# Altium PCB PCB1.PcbDoc (part 2 of 2)
Units mil, origin at the board's own origin, x right, y up, seen from the top; angles counter-clockwise.
Board outline 2900 x 2900 mil, 4 copper layers (Top Layer, Inner Layer, GND, Bottom Layer), stack 23.756 mil thick; 59 components, 117 nets, 456 pads, 163 vias.
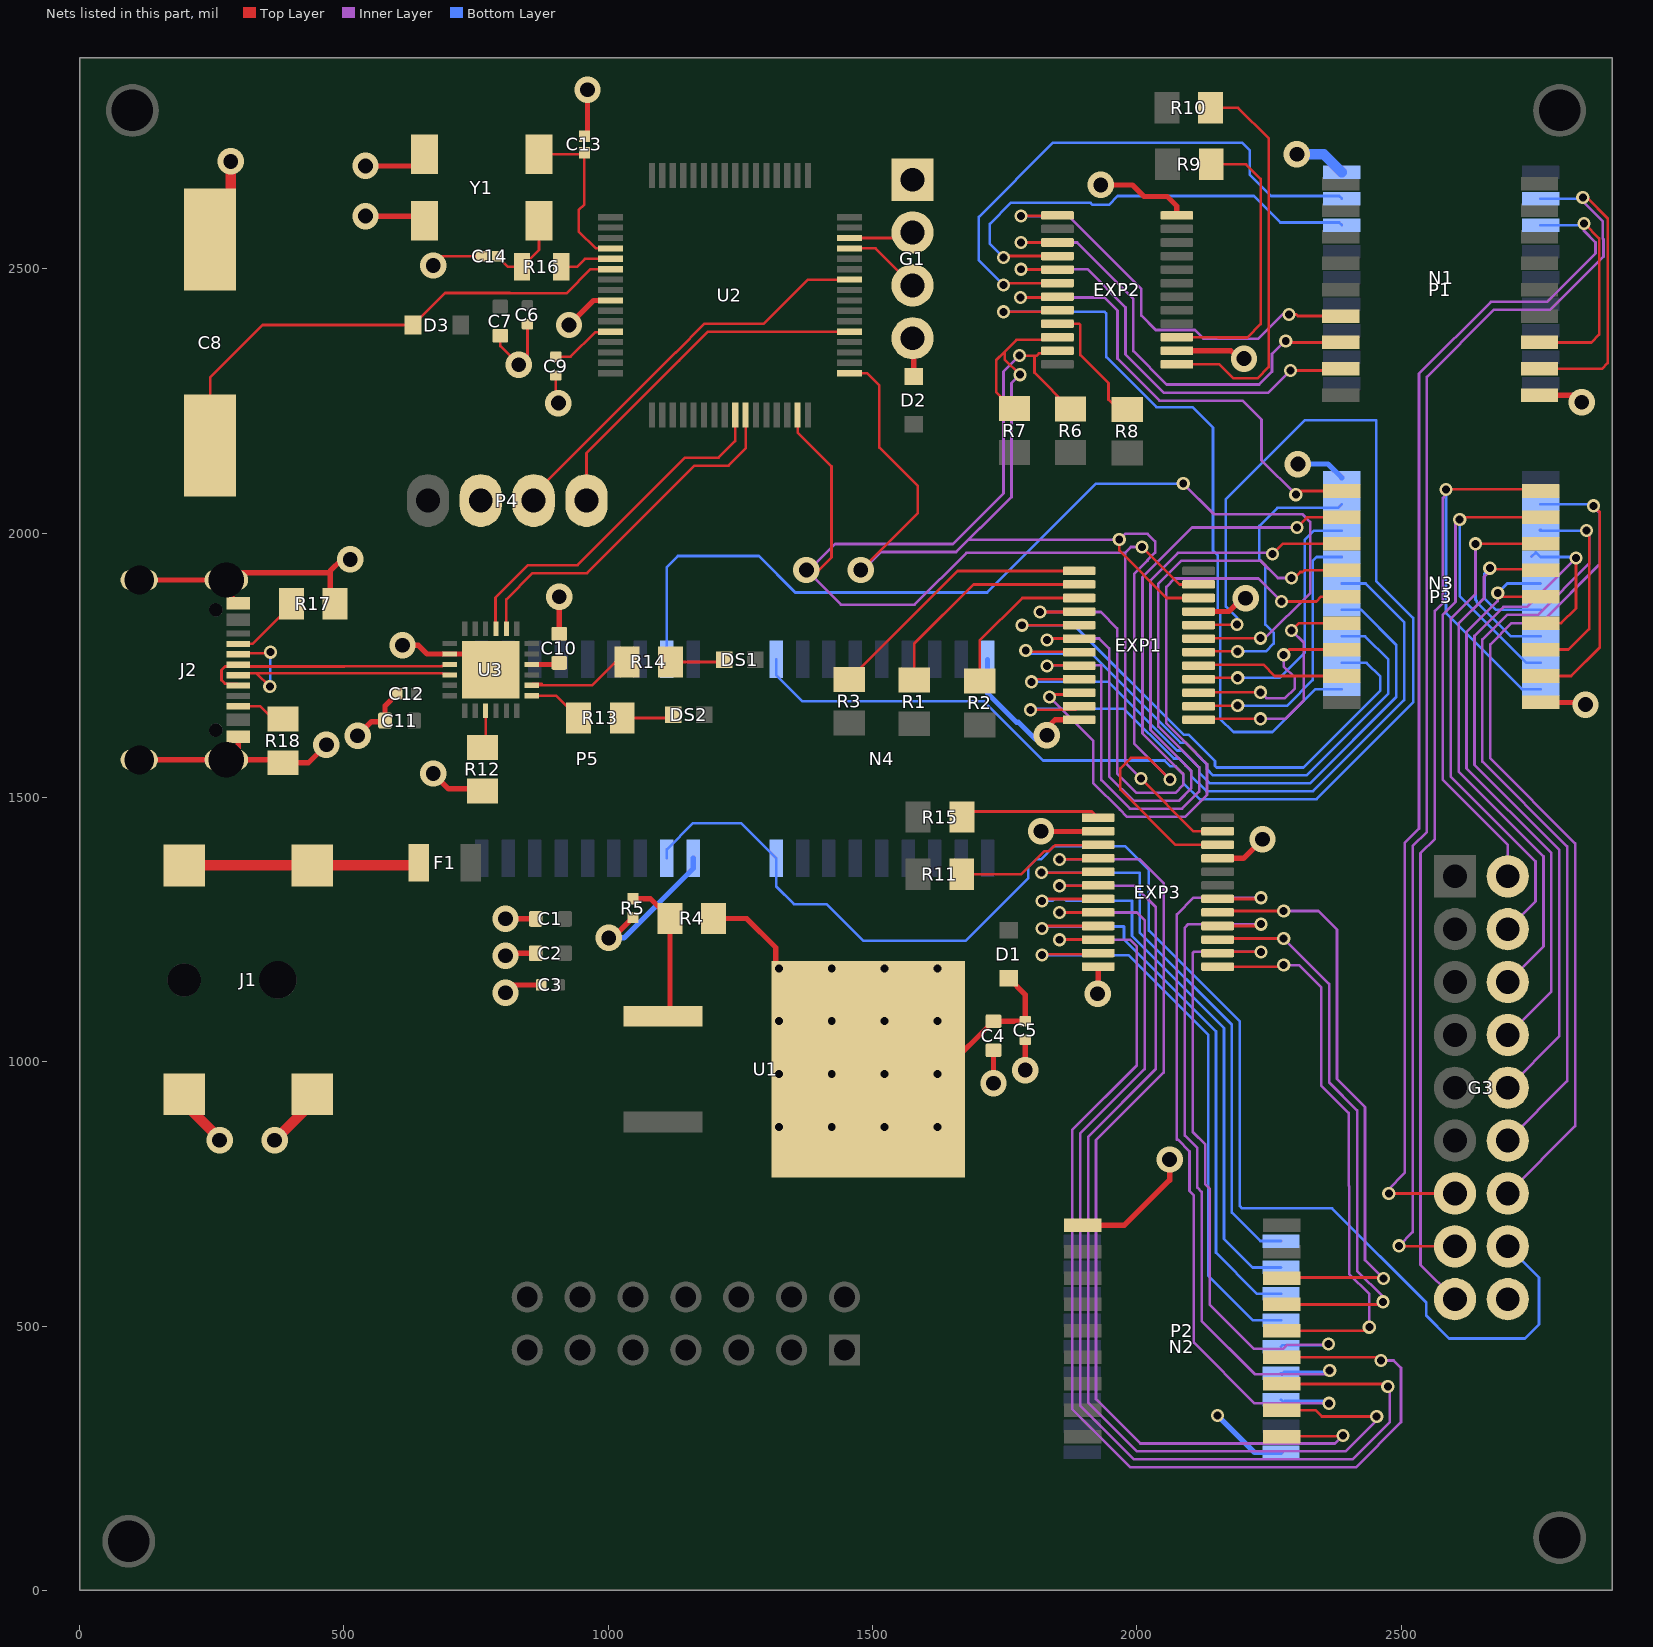
[diagram p4: the nets of this part, all layers, seen from the top]

## Via types
v1: diameter 25, hole 15, Top Layer to Bottom Layer, 123 vias
v2: diameter 50, hole 28, Top Layer to Bottom Layer, 36 vias
v3: diameter 100, hole 78, Top Layer to Bottom Layer, 4 vias

## Nets (pads, with @x,y where several pads share a name; then routed paths per layer and width w, separated by ;. In a path a pad name is that pad's centre, name@x,y a point inside that pad or via, vN(x,y) a via of type N, cw(c..) or ccw(c..) an arc to the next point about the centre after c; other vN are vias at no path point) (continued)
"Column 6 \"1\"": EXP2.13 P1.6 | length 822.1
  Top Layer w5: v1@1781.66,2600.66 EXP2.13@1849.36,2600.66 ; v1(2288,2414) 2301.89,2414 2304.89,2411 P1.6@2386.01,2411
  Top Layer w10: v1(1781,2600) v1@1781.66,2600.66 ; EXP2.13@1849.36,2600.66 EXP2.13@1850.02,2601.31
  Inner Layer w5: v1(1781,2600) 1871,2600 2008.69,2462.31 2008.69,2411.81 2036,2384.5 2110,2384.5 2126.43,2368.07 2229.96,2368.07 2277.89,2416 2286,2416 v1(2288,2414)
"Column 7": G3.7 N1.12 P1.12 | length 2620.1
  Top Layer w5: v1(2477,751) G3.7@2602,751 ; P1.12@2761.99,2361 2860,2361 2875,2376 2875,2558 2847,2586 v1(2846,2586)
  Inner Layer w5: v1(2477,751) 2475,753 2475,758 2507,790 2507,1414.21 2534,1441.21 2534,2302 2670,2438 2776.36,2438 2868,2529.64 2868,2550.36 2846,2572.36 v1(2846,2586)
  Bottom Layer w5: N1.12@2763.98,2583 2843,2583 v1(2846,2586)
"Column 7 \"0\"": EXP2.16 N1.7 | length 892.7
  Top Layer w5: v1(1748,2521.5) 1751.04,2524.54 EXP2.16@1850.02,2524.54 EXP2.16@1849.06,2525.5
  Bottom Layer w5: v1(1748,2521.5) 1722,2547.5 1722,2585.36 1761.64,2625 1912.97,2625 1916.47,2621.5 1947.53,2621.5 1964.03,2638 2221.64,2638 2271.64,2588 2383,2588 N1.7@2388,2583
"Column 7 \"1\"": EXP2.15 P1.7 | length 899.1
  Top Layer w5: v1(1781,2550) 1781.13,2550.13 EXP2.15@1850.02,2550.13 EXP2.15@1849.65,2550.5 ; v1(2282,2364) 2285,2361 P1.7@2386.01,2361
  Inner Layer w5: v1(1781,2550) 1887.37,2550 1993.69,2443.69 1993.69,2344.53 2056.71,2281.5 2231.79,2281.5 2256,2305.71 2256,2339.5 2280.5,2364 v1(2282,2364)
"Column 8": G3.8 N1.11 P1.11 | length 2879.7
  Top Layer w5: v1(2496,652) 2497,651 G3.8@2602,651 ; P1.11@2761.99,2311 2880,2311 2891,2322 2891,2596 2852,2635 v1(2844,2635)
  Inner Layer w5: v1(2496,652) 2522,678 2522,1408 2549,1435 2549,2295.79 2676.21,2423 2782.57,2423 2883,2523.43 2883,2556.57 2882,2557.57 2882,2590 2844,2628 v1(2844,2635)
  Bottom Layer w5: N1.11@2763.98,2633 2842,2633 v1(2844,2635)
"Column 8 \"0\"": EXP2.18 N1.8 | length 1067.8
  Top Layer w5: v1(1748,2469.5) 1751.86,2473.36 EXP2.18@1850.02,2473.36 EXP2.18@1849.88,2473.5
  Bottom Layer w5: v1(1748,2469.5) 1701.25,2516.25 1701.25,2598.25 1842,2739 2199,2739 2214,2724 2214,2678 2254,2638 2383,2638 N1.8@2388,2633
"Column 8 \"1\"": EXP2.17 P1.8 | length 847.3
  Top Layer w5: v1(1781,2499.54) 1781.59,2498.95 EXP2.17@1850.02,2498.95 EXP2.17@1848.47,2500.5 ; v1(2291,2308) 2375.01,2308 2382.01,2315 P1.8@2386.01,2311
  Inner Layer w5: v1(1781,2499.54) 1906.46,2499.54 1978.69,2427.31 1978.69,2338.31 2051,2266 2249,2266 v1(2291,2308)
"Column 9": G3.9 N3.18 P3.18 | length 2231.7
  Top Layer w5: v1(2585,2083) 2760.98,2083 P3.18@2763.98,2080
  Inner Layer w5: v1(2585,2083) 2585,2073 2579,2067 2579,1868 2564,1853 2564,1422 2537,1395 2537,616 G3.9@2602,551
  Bottom Layer w5: v1(2585,2083) 2585,1849 2729,1705 N3.18@2763.99,1705
"Column 9 \"0\"": EXP2.20 N3.1 | length 1470
  Top Layer w5: v1(1748,2419) 1846.83,2419 EXP2.20@1850.02,2422.18 EXP2.20@1849.2,2423
  Bottom Layer w5: v1(1748,2419) 1939,2419 1942.5,2415.5 1942.5,2333.5 2037.5,2238.5 2105.5,2238.5 2144.25,2199.75 2144.25,1967 2153.5,1957.75 2153.5,1855.25 2158,1850.75 2158,1649 2183,1624 2257,1624 2338,1705 N3.1@2388.01,1705
"Column 9 \"1\"": EXP2.19 P3.1 | length 934.8
  Top Layer w5: v1(1780,2446) 1848.24,2446 EXP2.19@1850.02,2447.77 EXP2.19@1849.79,2448 ; v1(2301,2073) 2308,2080 P3.1@2388,2080
  Inner Layer w5: v1(1780,2446) 1938.79,2446 1963.69,2421.1 1963.69,2330.31 2043,2251 2200,2251 2236,2215 2236,2138 v1(2301,2073)
"Column 10": G3.10 N3.17 P3.17 | length 1243.9
  Top Layer w5: v1(2611,2026) 2615,2030 P3.17@2763.98,2030
  Inner Layer w5: v1(2611,2026) 2603.21,2018.21 2603.21,1870.21 2579,1846 2579,1533.57 2702,1410.57 G3.10@2702,1351
  Bottom Layer w5: v1(2611,2026) 2611,1881.22 2737.22,1755 N3.17@2763.99,1755
"Column 10 \"0\"": EXP1.5 N3.2 | length 1073.3
  Top Layer w5: v1(1783,1826) 1890.62,1826 EXP1.5@1891.01,1826.39
  Bottom Layer w5: v1(1783,1826) 1881.79,1826 2088.79,1619 2098.21,1619 2148,1569.21 2148,1559.93 2150.93,1557 2315.15,1557 2461,1702.85 2461,1729 2435,1755 N3.2@2388.01,1755
"Column 10 \"1\"": EXP1.4 P3.2 | length 1503
  Top Layer w5: v1(1817,1851) 1890.03,1851 EXP1.4@1891.01,1851.98 ; v1(2303,2011) 2322,2030 P3.2@2388,2030
  Inner Layer w5: v1(1817,1851) 1932,1851 1963,1820 1963,1545.64 1999.64,1509 2073.36,1509 2088,1523.64 2088,1544.36 2086.68,1545.68 2011,1621.36 2011,1917.21 2104.79,2011 v1(2303,2011)
"Column 11": G3.11 N3.16 P3.16 | length 1218.2
  Top Layer w5: v1(2641,1980) P3.16@2763.98,1980
  Inner Layer w5: v1(2641,1980) 2641,1885 2594,1838 2594,1539.79 2754.5,1379.29 2754.5,1303.5 G3.11@2702,1251
  Bottom Layer w5: v1(2641,1980) 2641,1874 2643,1872 2643,1870.43 2708.43,1805 N3.16@2763.99,1805
"Column 11 \"0\"": EXP1.7 N3.3 | length 1126.1
  Top Layer w5: v1(1790,1778) 1792.46,1775.54 1890.67,1775.54 EXP1.7@1891.01,1775.2
  Bottom Layer w5: v1(1790,1778) 1795.5,1772.5 1803.6,1772.5 1914.07,1772.5 2082.57,1604 2091.99,1604 2133,1562.99 2133,1553.57 2144.57,1542 2321.36,1542 2476,1696.64 2476,1761 2432,1805 N3.3@2388.01,1805
"Column 11 \"1\"": EXP1.6 P3.3 | length 1433.2
  Top Layer w5: v1(1830,1798) 1833,1801 1890.8,1801 EXP1.6@1891.01,1800.8 ; v1(2257,1961) 2276,1980 P3.3@2388,1980
  Inner Layer w5: v1(1830,1798) 1833,1801 1929,1801 1948,1782 1948,1539.43 1993.43,1494 2079.57,1494 2103,1517.43 2103,1550.57 2101.68,1551.89 2093.28,1560.28 2092,1561.57 2092,1562 2026,1628 2026,1911 2078,1963 2255,1963 v1(2257,1961)
"Column 12": G3.12 N3.15 P3.15 | length 1181.8
  Top Layer w5: v1(2668,1934) 2670,1932 2747.98,1932 2756.98,1923 P3.15@2763.98,1930
  Inner Layer w5: v1(2668,1934) 2668,1928.59 2657.1,1917.69 2657.1,1877.1 2609,1829 2609,1549.21 2769.5,1388.71 2769.5,1218.5 G3.12@2702,1151
  Bottom Layer w5: v1(2668,1934) 2658,1924 2658,1876.64 2679.64,1855 N3.15@2763.99,1855
"Column 12 \"0\"": EXP1.9 N3.4 | length 1163.7
  Top Layer w5: v1(1801,1719) 1806.02,1724.02 EXP1.9@1891.01,1724.02
  Bottom Layer w5: v1(1801,1719) 1946.36,1719 2076.36,1589 2085.78,1589 2118,1556.78 2118,1547.36 2138.36,1527 2327.57,1527 2491,1690.43 2491,1789 2425,1855 N3.4@2388.01,1855
"Column 12 \"1\"": EXP1.8 P3.4 | length 1412.9
  Top Layer w5: v1(1830,1749) 1831.06,1750.06 1890.57,1750.06 EXP1.8@1891.01,1749.61 ; v1(2293,1915.52) 2298.41,1915.52 2309.58,1926.68 2313.65,1926.68 2316.97,1930 P3.4@2388,1930
  Inner Layer w5: v1(1830,1749) 1831.54,1750.54 1932.46,1750.54 1933,1750 1933,1533.22 1987.22,1479 2085.78,1479 2118,1511.22 2118,1556.78 2116.68,1558.1 2107,1567.78 2107,1568.21 2041,1634.21 2041,1904.79 2084.21,1948 2234.64,1948 2267.13,1915.52 v1(2293,1915.52)
"Column 13": G3.13 N3.14 P3.14 | length 1134.6
  Top Layer w5: v1(2683,1887) 2683,1885 2688,1880 P3.14@2763.98,1880
  Inner Layer w5: v1(2683,1887) 2683,1872 2624,1813 2624,1555.43 2784.5,1394.93 2784.5,1133.5 G3.13@2702,1051
  Bottom Layer w5: v1(2683,1887) 2701,1905 N3.14@2763.99,1905
"Column 13 \"0\"": EXP1.11 N3.5 | length 1240.2
  Top Layer w5: v1(1799,1666) 1884.17,1666 EXP1.11@1891.01,1672.84
  Bottom Layer w5: v1(1799,1666) 1801,1668 1976.15,1668 2070.15,1574 2079.57,1574 2103,1550.57 2103,1541.15 2132.15,1512 2333.79,1512 2506,1684.21 2506,1832 2433,1905 N3.5@2388.01,1905
"Column 13 \"1\"": EXP1.10 P3.5 | length 1300.8
  Top Layer w5: v1(1835,1690) 1840,1695 1887.57,1695 EXP1.10@1891.01,1698.43 ; v1(2274,1871) 2340,1871 2349,1880 P3.5@2388,1880
  Inner Layer w5: v1(1835,1690) 1918,1607 1918,1527.01 1968,1477 1981.01,1464 2091.99,1464 2133,1505.01 2133,1562.99 2131.68,1564.32 2122,1573.99 2122,1574.43 2056,1640.43 2056,1898.57 2071.93,1914.5 2230.5,1914.5 v1(2274,1871)
"Column 14": G3.14 N3.13 P3.13 | length 1480.2
  Top Layer w5: P3.13@2763.98,1830 2803,1830 2831,1858 v1(2831,1953)
  Inner Layer w5: G3.14@2702,951 2799.5,1048.5 2799.5,1401.14 2639,1561.64 2639,1806 2693.79,1860.79 2738.79,1860.79 v1(2831,1953)
  Bottom Layer w5: N3.13@2746.99,1956 2754.99,1964 N3.13@2763.99,1955 2829,1955 v1(2831,1953)
"Column 14 \"0\"": EXP1.14 N3.6 | length 520.3
  Top Layer w5: EXP1.14@2116.99,1672.84 2118.15,1674 v1(2191,1674)
  Bottom Layer w5: v1(2191,1674) 2285,1674 2333,1722 2333,1948 2340,1955 N3.6@2388.01,1955
"Column 14 \"1\"": EXP1.13 P3.6 | length 466.5
  Top Layer w5: EXP1.13@2116.99,1647.25 2118.74,1649 v1(2234,1649) ; v1(2293,1816) 2307,1830 P3.6@2388,1830 P3.6@2381,1823
  Inner Layer w5: v1(2234,1649) 2281,1649 2316,1684 2316,1793 v1(2293,1816)
"Column 15": G3.15 N3.12 P3.12 | length 1773.9
  Top Layer w5: P3.12@2763.98,1780 2817,1780 2856,1819 2856,2000 v1(2851,2005)
  Inner Layer w5: G3.15@2702,851 2814.5,963.5 2814.5,1407.35 2654,1567.85 2654,1799 2700.79,1845.79 2759.14,1845.79 2856,1942.64 2856,2000 v1(2851,2005)
  Bottom Layer w5: N3.12@2763.99,2005 2762.99,2006 2763.99,2007 2765.99,2005 v1(2851,2005)
"Column 15 \"0\"": EXP1.16 N3.7 | length 512.8
  Top Layer w5: EXP1.16@2116.99,1724.02 2119.47,1726.5 v1(2191,1726.5)
  Bottom Layer w5: v1(2191,1726.5) 2270.5,1726.5 2318,1774 2318,1988 2335,2005 N3.7@2388.01,2005
"Column 15 \"1\"": EXP1.15 P3.7 | length 392.4
  Top Layer w5: EXP1.15@2116.99,1698.43 2118.06,1699.5 2234,1699.5 v1(2234.34,1699.16) ; v1@2283,1765 v1(2278,1770) 2288,1780 P3.7@2388,1780 P3.7@2385,1777
  Inner Layer w5: v1(2234.34,1699.16) 2245.5,1688 2280.36,1688 2299,1706.64 2299,1727.36 2278,1748.36 v1(2278,1770)
"Column 16": G3.16 N3.11 P3.11 | length 2052.2
  Top Layer w5: P3.11@2763.98,1730 2822,1730 2876,1784 2876,2040 v1(2864,2052)
  Inner Layer w5: G3.16@2702,751 2829.5,878.5 2829.5,1413.57 2669,1574.07 2669,1790 2709,1830 2749,1830 2749.79,1830.79 2765.36,1830.79 2876,1941.43 2876,2038 2864,2050 v1(2864,2052)
  Bottom Layer w5: N3.11@2763.99,2055 2861,2055 v1(2864,2052)
"Column 16 \"0\"": EXP1.18 N3.8 | length 555.6
  Top Layer w5: EXP1.18@2116.99,1775.2 2118.29,1776.5 v1(2191,1776.5)
  Bottom Layer w5: v1(2191,1776.5) 2244.36,1776.5 2259,1791.14 2259,1811.86 2243.5,1827.36 2243.5,1939.14 2232,1950.64 2232,2014 2266,2048 2381.01,2048 N3.8@2388.01,2055
"Column 16 \"1\"": EXP1.17 P3.8 | length 289.2
  Top Layer w5: EXP1.17@2116.99,1749.61 2118.88,1751.5 2239.5,1751.5 2261,1730 P3.8@2388,1730 P3.8@2382,1724
"Column 17": G3.17 N4.18 P5.11 | length 2752.4
  Bottom Layer w5: P5.11@1111,1385.28 1111,1402 1160.5,1451.5 1251.53,1451.5 N4.18@1317.76,1385.28 1317.76,1332.24 1351.5,1298.5 1413.5,1298.5 1483,1229 1522,1229 1676.36,1229 1795,1347.64 1795,1368.36 1809.64,1383 1818.64,1383 1843.64,1408 1978,1408 2023,1363 2023,1248.43 2195,1076.43 2195,727 2199,723 2369.36,723 2547.75,544.61 2547.75,519.75 2591,476.5 2734.5,476.5 2761,503 2761,592 G3.17@2702,651
"Column 17 \"0\"": EXP1.20 N4.1 | length 2645.2
  Top Layer w5: EXP1.20@2116.99,1826.39 2117.62,1827.01 2188.98,1827.01 v1(2189.61,1827.63)
  Bottom Layer w5: N4.1@1317.76,1761.26 1317.76,1732.24 1368,1682 1711,1682 1823,1570 2052.93,1570 2063.93,1559 2073.36,1559 2088,1544.36 2088,1528 2119,1497 2340,1497 2523,1680 2523,1840 2453,1910 2453,2214 2318,2214 2168.5,2064.5 2168.5,1861.47 2189.61,1840.36 v1(2189.61,1827.63)
"Column 17 \"1\"": EXP1.19 P5.8 | length 1933.4
  Top Layer w5: EXP1.19@2116.99,1800.8 2117.7,1801.5 v1(2234,1801.5)
  Inner Layer w5: v1(2088,2094) 2146,2036 2313.36,2036 2328,2021.36 2328,1886.36 2243.14,1801.5 v1(2234,1801.5) v1@2226.5,1801.5
  Bottom Layer w5: P5.8@1111,1761.26 1111,1936 1132,1957 1285,1957 1354,1888 1717,1888 1923,2094 v1(2088,2094)
D_N: J2.A7 J2.B7 U3.4 | length 576.3
  Top Layer w5: J2.B7@300.2,1771.02 302.2,1773.01 359.01,1773.01 v1(361,1775) ; J2.A7@300.72,1732.16 J2.A7@300.2,1731.65 303.61,1735.05 325.2,1735.05 ; 325.2,1734.99 335,1734.99 ; v1(360,1710) 335,1734.99 ; U3.4@691.39,1732.16 U3.4@700.24,1732.16 ; U3.4@699.9,1732.5 U3.4@700.24,1732.16 ; 335,1734.99 506.47,1734.99 506.98,1735.5 686.04,1735.5 686.96,1734.58 697.82,1734.58 U3.4@700.24,1732.16
  Bottom Layer w5: v1(360,1710) 360.5,1710.5 360.5,1774.5 v1(361,1775)
D_P: J2.A6 J2.B6 U3.3 | length 508.3
  Top Layer w5: J2.B6@300.2,1711.96 296.8,1715.37 275.21,1715.37 268.57,1722.01 268.57,1741.28 275.21,1747.93 296.8,1747.93 J2.A6@300.2,1751.33 ; J2.A6@303.61,1747.93 J2.A6@300.2,1751.33 ; U3.3@691.39,1751.84 U3.3@700.24,1751.84 ; U3.3@699.73,1751.33 U3.3@700.24,1751.84 ; J2.A6@300.2,1751.33 303.55,1747.99 501.08,1747.99 501.6,1748.5 686.04,1748.5 686.96,1749.42 697.82,1749.42 U3.3@700.24,1751.84
GND: C1.2 C2.2 C3.2 C4.2 C5.2 C6.1 C7.1 C8.1 C9.2 C10.1 C11.2 C12.2 C13.1 C14.1 EXP1.12 EXP1.21 EXP2.2 EXP2.12 EXP3.2 EXP3.12 EXP3.21 G1.1 G3.18 J1.2 J1.3 J2.1 J2.2 J2.3 J2.4 J2.A1-B12 J2.B1-A12 N1.9 N2.9 N3.9 N4.9 P1.10 P2.10 P3.10 P4.2 P5.10 R5.2 R12.1 R17.1 R18.1 U2.9 U3.2 U3.25 Y1.2 Y1.3 | length 5006.2
  Top Layer w5: C8.1@285,2482.57 C8.1@285,2555.57 ; Y1.2@630.74,2695 Y1.2@652.73,2716.99 Y1.2@640.72,2729 ; Y1.3@640.72,2579 Y1.3@652.73,2591.01 Y1.3@643.74,2600 ; v2(669,2506.57) 686.43,2524 C14.1@760.29,2524 ; C7.1@796,2373.88 796,2354 v2(831,2319) 847.34,2335.34 C6.1@847.34,2395.63 ; C9.2@901,2298.57 901,2251.28 v2(906,2246.28)
  Top Layer w10: J2.4@113,1571.41 J2.2@277.57,1571.41 ; J2.3@113,1911.57 J2.1@277.57,1911.57 ; J2.B1-A12@300.2,1615.5 300.2,1594.05 J2.2@277.57,1571.41 ; J2.A1-B12@300.2,1867.47 277.57,1890.11 J2.1@277.57,1911.57 ; v2(467,1599.89) 433,1565.89 R18.1@385,1565.89 379.48,1571.41 J2.2@277.57,1571.41 ; 470.94,1925.5 291.5,1925.5 J2.1@277.57,1911.57 ; R17.1@483.34,1866.57 474,1875.91 474,1928.57 496,1950.57 v2(512,1950.57) ; v2(526,1617) 552.57,1643.57 576,1643.57 C11.2@578,1645.57 578,1673.57 C12.2@601,1696.57 ; v2(541,2600) Y1.3@643.74,2600 ; v2@542,2695 Y1.2@630.74,2695 ; v2(611,1788) 641,1788 657.47,1771.53 U3.2@700.24,1771.53 748.47,1771.53 U3.25@778,1742 ; v2(669,1545.57) 698,1516.57 758.04,1516.57 R12.1@762.53,1512.08 R12.1@757.53,1507.08 ; v2(805.8,1130.57) 820.8,1145.57 C3.2@873.08,1145.57 ; v2(805.8,1200.57) 810.8,1205.57 C2.2@863.24,1205.57 ; v2(805.8,1270.57) C1.2@863.24,1270.57 ; C10.1@907.53,1809.87 v2(907.53,1879.76) ; v2(926,2394) 972.54,2440.54 U2.9@1004.15,2440.54 ; C13.1@955,2750.92 961,2756.92 v2(961,2839) ; v2(1001,1234.57) 1008.43,1234.57 R5.2@1047,1273.13 ; v2(1729,959.36) C4.2@1729,1021.8 ; v2(1789,984.36) C5.2@1789,1041.65 ; v2(1818.87,1436.15) 1819,1436 1926.44,1436 1926.8,1436.36 EXP3.2@1927.01,1436.16 ; v2(1830,1618) 1830,1632 1845.25,1647.25 EXP1.12@1891.01,1647.25 ; P2.10@1898.01,691 1977,691 2062.28,776.28 v2(2062.28,815.28) ; v2(1926,1129) 1927.01,1130.01 EXP3.12@1927.01,1180.25 ; v2(1932,2659) 1992,2659 2014,2637 2057.66,2637 2076,2618.66 EXP2.12@2076,2601.31 ; EXP2.2@2076,2345.41 2178.01,2345.41 2192.85,2330.57 v2(2203.01,2330.57) ; EXP1.21@2116.99,1851.98 2174.46,1851.98 2199.48,1877 v2(2206,1877) ; EXP3.21@2152.99,1384.98 2201.98,1384.98 v2(2238,1421) ; P1.10@2761.99,2261 2829,2261 v2(2842,2248) ; P3.10@2763.98,1680 2845,1680 v2(2849,1676)
  Top Layer w20: J1.2@198,938.5 198,921.57 v2@265,854.57 ; C8.1@247,2555.57 286,2594.57 v2(286,2703.57) ; v2(369,851.57) 440.13,922.69 J1.3@440.13,938.5
  Bottom Layer w10: v2(1001,1234.57) 1029.73,1234.57 1161,1365.83 P5.10@1161,1385.28 ; N4.9@1717.76,1761.26 1717.76,1697.35 1772.61,1642.5 1776.5,1642.5 1808,1611 1830,1611 v2(1830,1618) ; v1(2153,331) 2223.01,260.99 N2.9@2272.99,260.99 ; v2(2305,2131) 2362.01,2131 N3.9@2388.01,2105
  Bottom Layer w20: v2(2303,2717) 2354,2717 N1.9@2388,2683
  other v2: 265,851.57 541,2695
"Goldpin 3.7V": D2.2 G1.4 | length 87.4
  Top Layer w10: D2.2@1568,2306.55 D2.2@1578,2296.55 1578,2367 G1.4@1576,2369
NetC8_2: C8.2 D3.1 U2.6 | length 971.5
  Top Layer w5: C8.2@247,2165.8 247,2295 346,2394 D3.1@630.72,2394 691.22,2454.5 814.23,2454.5 814.73,2454 921,2454 966.59,2499.59 U2.6@1004.15,2499.59
NetC9_1: C9.1 U2.12 | length 122.8
  Top Layer w5: C9.1@901,2334 929.15,2334 975.35,2380.2 1002.87,2380.2 U2.12@1004.15,2381.48
NetC10_2: C10.2 U3.16 | length 53
  Top Layer w10: U3.16@855.76,1751.84 904.61,1751.84 C10.2@907.53,1754.76
NetC13_2: C13.2 U2.4 Y1.1 | length 313.6
  Top Layer w5: Y1.1@869.27,2716.99 951.78,2716.99 C13.2@955,2720.21 955,2622.22 944.35,2611.57 944.35,2571.24 976.63,2538.96 U2.4@1004.15,2538.96
NetC14_2: C14.2 R16.2 Y1.4 | length 154.7
  Top Layer w5: C14.2@791,2524 811,2504 R16.2@837,2504 869.27,2536.27 Y1.4@869.27,2591.01
NetDS1_2: DS1.2 R14.1 | length 102.8
  Top Layer w5: R14.1@1118.34,1756.57 1215.47,1756.57 DS1.2@1219.47,1760.56
NetDS2_2: DS2.2 R13.1 | length 98.8
  Top Layer w5: R13.1@1026.68,1650.57 1117,1650.57 DS2.2@1123,1656.57
NetEXP1_1: EXP1.1 R3.2 | length 520
  Top Layer w5: R3.2@1456,1723.68 1661.07,1928.75 EXP1.1@1891.01,1928.75
NetEXP1_2: EXP1.2 R1.2 | length 427.1
  Top Layer w5: R1.2@1579,1722.34 1579,1791 1691.16,1903.16 EXP1.2@1891.01,1903.16
NetEXP1_3: EXP1.3 R2.2 | length 298
  Top Layer w5: R2.2@1703,1720.34 1703,1797 1783.57,1877.57 EXP1.3@1891.01,1877.57
NetEXP2_1: EXP2.1 R10.1 | length 760.1
  Top Layer w5: EXP2.1@2076,2319.82 2156,2319.82 2182.75,2293.07 2228.07,2293.07 2249.5,2314.5 2249.5,2747.5 2192,2805 R10.1@2139.68,2805
NetEXP2_3: EXP2.3 R9.2 | length 549
  Top Layer w5: EXP2.3@2076,2371 2153.41,2371 2153.91,2370.5 2209.5,2370.5 2234.5,2395.5 2234.5,2670.5 2207,2698 R9.2@2141,2698
NetEXP2_21: EXP2.21 R8.2 | length 223.6
  Top Layer w5: EXP2.21@1850.02,2396.59 1890.41,2396.59 1893.42,2393.58 1893.42,2337 1946.5,2283.92 1946.5,2252.84 R8.2@1958,2241.34
NetEXP3_1: EXP3.1 R15.1 | length 266.3
  Top Layer w5: R15.1@1670.59,1461.75 1682.49,1473.65 1915.11,1473.65 EXP3.1@1927.01,1461.75
NetEXP3_3: EXP3.3 R11.2 | length 281
  Top Layer w5: R11.2@1669,1355 1781.64,1355 1825.29,1398.65 1834.29,1398.65 1843.64,1408 1844.03,1408 1846.03,1410 1926.44,1410 EXP3.3@1927.01,1410.57
NetF1_1: F1.1 J1.1 | length 445.9
  Top Layer w20: J1.1@198,1371.57 J1.1@440.13,1371.57 636.79,1371.57 F1.1@641.79,1376.57
NetJ2_A5: J2.A5 R17.2 | length 133
  Top Layer w5: J2.A5@300.2,1790.7 326.74,1790.7 400.66,1864.62 R17.2@400.66,1866.57
NetJ2_B5: J2.B5 R18.2 | length 94.7
  Top Layer w5: J2.B5@300.2,1672.59 342,1672.59 366.02,1648.57 R18.2@385,1648.57
NetR4_1: R4.1 R5.1 U1.1 | length 275.8
  Top Layer w10: R5.1@1047,1308.57 1079.8,1308.57 R4.1@1117,1271.36 1117,1099.39 U1.1@1103.97,1086.36
NetR12_2: R12.2 U3.9 | length 71.8
  Top Layer w5: R12.2@762.53,1594.76 768.16,1600.39 U3.9@768.16,1664.24
NetR13_2: R13.2 U3.13 | length 105.7
  Top Layer w5: U3.13@855.76,1692.79 901.78,1692.79 R13.2@944,1650.57
NetR14_2: R14.2 U3.14 | length 198.9
  Top Layer w5: 874.71,1714.74 858.02,1714.74 U3.14@855.76,1712.47 969.57,1712.47 R14.2@1015.66,1758.57
NetR16_1: R16.1 U2.5 | length 99.5
  Top Layer w5: R16.1@911,2504 941,2504 956.28,2519.28 U2.5@1004.15,2519.28
"Output: Row 1 \"0\"": G2.13 N2.18 | length 1326.9
  Bottom Layer w10: G2.13@847,455 1006,296 1583.28,296 1839,551.72 1839,653.86 1846.13,660.99 N2.18@1897.01,660.99
"Output: Row 1 \"1\"": G2.14 P2.18 | length 1541.3
  Top Layer w10: G2.14@847,555 847,602 845,602 829,618 797.14,618 789,609.86 789,380 939,230 1803,230 1864,291 P2.18@1898.01,291
"Output: Row 2 \"0\"": G2.11 N2.17 | length 1483.6
  Bottom Layer w10: G2.11@947,455 1086,316 1575,316 1819,560 1819,688 1854,723 1953.15,723 1968,708.15 1968,632.99 1946,610.99 N2.17@1897.01,610.99
"Output: Row 2 \"1\"": G2.12 P2.17 | length 1922.5
  Top Layer w10: G2.12@947,555 947,608 917,638 788.85,638 769,618.15 769,365.28 924.28,210 1932.14,210 1953,230.86 1953,334 1946,341 P2.17@1898.01,341
"Output: Row 3 \"0\"": G2.9 N2.16 | length 1495.6
  Bottom Layer w10: G2.9@1047,455 1166,336 1557,336 1798.5,577.5 1798.5,707 1845.5,754 1952,754 1992,714 1992,582 1970.99,560.99 N2.16@1897.01,560.99
"Output: Row 3 \"1\"": G2.10 P2.16 | length 2189.4
  Top Layer w10: G2.10@1047,555 1047,622 1022,647 973.51,647 962.51,658 780.57,658 749,626.43 749,357 916,190 1948,190 1973,215 1973,344 1926,391 P2.16@1898.01,391
"Output: Row 4 \"0\"": G2.7 N2.15 | length 1491.7
  Bottom Layer w10: G2.7@1147,455 1246,356 1536,356 1778.5,598.5 1778.5,722.07 1830.43,774 1958.72,774 2021,711.72 2021,543.98 1988.01,510.99 N2.15@1897.01,510.99
"Output: Row 4 \"1\"": G2.8 P2.15 | length 2485
  Top Layer w10: G2.8@1147,555 1147,639 1119,667 981.79,667 970.79,678 772.28,678 729,634.72 729,348.72 909,168.72 1955.72,168.72 1993,206 1993,405 1957,441 P2.15@1898.01,441
"Output: Row 5 \"0\"": G2.5 N2.14 | length 1467.8
  Bottom Layer w10: G2.5@1247,455 1325,377 1526,377 1758.5,609.5 1758.5,730.36 1822.14,794 1967,794 2041,720 2041,521.98 1980.01,460.99 N2.14@1897.01,460.99
"Output: Row 5 \"1\"": G2.6 P2.14 | length 2767.4
  Top Layer w10: G2.6@1247,555 1246,556 1246,639 1198,687 990.08,687 979.08,698 764,698 709,643 709,338 708.5,337.5 901,145 1964,145 2020,201 2020,434 1963,491 P2.14@1898.01,491
"Output: Row 6 \"0\"": G2.3 N2.13 | length 1450.6
  Bottom Layer w10: G2.3@1347,455 1405,397 1505,397 1738.5,630.5 1738.5,738.64 1813.86,814 1975.28,814 2064,725.28 2064,487 1987.99,410.99 N2.13@1897.01,410.99
"Output: Row 6 \"1\"": G2.4 P2.13 | length 3058.5
  Top Layer w10: G2.4@1347,555 1347,643 1283,707 998.36,707 984.36,721 755,721 689,655 689,346.28 688.5,345.78 688.5,329.22 892.72,125 1972.28,125 2040,192.72 2040,494 1993,541 P2.13@1898.01,541
"Output: Row 7 \"0\"": G2.1 N2.12 | length 1426.8
  Bottom Layer w10: G2.1@1447,455 1534.72,455 1718.5,638.78 1718.5,746.93 1805.57,834 1987,834 2085,736 2085,421 2024.99,360.99 N2.12@1897.01,360.99
"Output: Row 7 \"1\"": G2.2 P2.12 | length 3327.4
  Top Layer w10: G2.2@1447,555 1447,647 1367,727 1006.64,727 992.64,741 746.72,741 669,663.28 669,354.57 668.5,354.07 668.5,320.93 884.43,105 1982,105 2066,189 2066,509 1984,591 P2.12@1898.01,591
RegOut: C4.1 C5.1 D1.2 R4.2 U1.4 | length 1153.5
  Top Layer w10: R4.2@1199.68,1271.36 1262,1271.36 1317,1216.36 U1.4@1317,1177 ; v1(1323,1177) v1(1423,1177) v1(1523,1177) v1(1623,1177) v1(1523,1077) 1491.76,1045.76 U1.4@1491.76,986.36 1638.44,986.36 C4.1@1729,1076.92 1729.16,1077.08 C5.1@1789,1077.08 1789,1127.57 1788.72,1127.57 D1.2@1758,1158.29
  other v1: 1323,877 1423,877 1523,877 1623,877 1323,977 1423,977 1523,977 1623,977 1323,1077 1423,1077 1623,1077
"Row 1 \"0\"": EXP3.5 N2.1 | length 1124
  Top Layer w5: v1(1820,1358) 1925.62,1358 EXP3.5@1927.01,1359.39
  Bottom Layer w5: v1(1820,1358) 2006,1358 2006,1244.21 2180,1070.21 2180,715 2234.01,660.99 N2.1@2272.99,660.99
"Row 1 \"1\"": EXP3.4 P2.1 | length 1943.3
  Top Layer w5: v1(1854,1383) 1925.03,1383 EXP3.4@1927.01,1384.98 ; P2.1@2273.99,291 2274.99,292 2389,292 v1(2390,293)
  Inner Layer w5: v1(1854,1383) 2006,1383 2051,1338 2051,980 1923,852 1923,362 2007,278 2375,278 v1(2390,293)
"Row 2 \"0\"": EXP3.7 N2.2 | length 1122.2
  Top Layer w5: v1(1821,1304.5) 1824.7,1308.2 1843.44,1308.2 1843.64,1308 1864.36,1308 1864.56,1308.2 EXP3.7@1927.01,1308.2
  Bottom Layer w5: v1(1821,1304.5) 1840.6,1304.5 1843.64,1307.54 1864.36,1307.54 1867.4,1304.5 1991,1304.5 1991,1238 2165,1064 2165,665 2219.01,610.99 N2.2@2272.99,610.99
"Row 2 \"1\"": EXP3.6 P2.2 | length 2064.9
  Top Layer w5: v1(1854,1333) 1926.21,1333 EXP3.6@1927.01,1333.8 EXP3.6@1925.8,1335 ; P2.2@2273.99,341 2338.15,341 2350.15,329 v1(2454,329)
  Inner Layer w5: v1(1854,1333) 1996,1333 2036,1293 2036,986.21 1908,858.21 1908,355.79 2000.79,263 2395.36,263 2454,321.64 v1(2454,329)
"Row 3 \"0\"": EXP3.9 N2.3 | length 1108.7
  Top Layer w5: v1(1821,1252.5) 1825.52,1257.02 EXP3.9@1927.01,1257.02
  Bottom Layer w5: v1(1821,1252.5) 1824.5,1256 1976,1256 1976,1231.79 2150,1057.79 2150,639 2228.01,560.99 N2.3@2272.99,560.99
"Row 3 \"1\"": EXP3.8 P2.3 | length 2138.4
  Top Layer w5: v1(1854,1282.54) 1854.07,1282.61 EXP3.8@1927.01,1282.61 ; P2.3@2273.99,391 2274.4,390.6 2464.99,390.6 2469.59,386 v1(2475,386)
  Inner Layer w5: v1(1854,1282.54) 2000.46,1282.54 2015,1268 2015,986.43 1893,864.43 1893,349.57 1994.57,248 2408.36,248 2479,318.64 2479,382 v1(2475,386)
"Row 4 \"0\"": EXP3.11 N2.4 | length 1112.7
  Top Layer w5: v1(1821,1202) 1822.32,1203.32 EXP3.11@1924.49,1203.32
  Top Layer w10: EXP3.11@1924.49,1203.32 EXP3.11@1927.01,1205.84
  Bottom Layer w5: v1(1821,1202) 1984.57,1202 2135,1051.57 2135,596 2220.01,510.99 N2.4@2272.99,510.99
"Row 4 \"1\"": EXP3.10 P2.4 | length 2190.3
  Top Layer w5: v1(1854,1231) 1854.43,1231.43 EXP3.10@1927.01,1231.43 ; P2.4@2273.99,441 2354.64,441 2456,441 v1(2462,435)
  Inner Layer w5: v1(1854,1231) 1988,1231 2000,1219 2000,992.64 1878,870.64 1878,343.36 1988.36,233 2414.57,233 2500,318.43 2500,421 2486,435 v1(2462,435)
"Row 5 \"0\"": EXP3.14 N2.5 | length 1248.1
  Top Layer w5: EXP3.14@2152.99,1205.84 2155.15,1208 v1(2235,1208)
  Inner Layer w5: v1(2235,1208) 2108,1208 2106,1206 2106,867.03 2129.78,843.24 2129.78,768.24 2138,760.03 2138,540.5 2221.5,457 2277.03,457 2285.03,465 2363,465 v1(2363,466)
  Bottom Layer w5: N2.5@2272.99,460.99 2276.09,464.09 2362.09,464.09 2363,465 v1(2363,466)
"Row 5 \"1\"": EXP3.13 P2.5 | length 1069.7
  Top Layer w5: EXP3.13@2152.99,1180.25 2275.25,1180.25 v1(2278,1183) ; P2.5@2273.99,491 2280.49,484.5 2286.99,491 2433,491 v1(2440,498)
  Inner Layer w5: v1(2278,1183) 2307.29,1183 2349,1141.29 2349,955.22 2401,903.22 2401,766 2402,765 2402,598.43 2440,560.43 v1(2440,498)
"Row 6 \"0\"": EXP3.16 N2.6 | length 1369.9
  Top Layer w5: EXP3.16@2152.99,1257.02 2231.52,1257.02 v1(2235,1260.5)
  Inner Layer w5: v1(2235,1260.5) 2097.5,1260.5 2091,1254 2091,860.81 2114.78,837.03 2114.78,762.03 2123,753.81 2123,510 2224,409 2358,409 v1(2365,416)
  Bottom Layer w5: N2.6@2272.99,410.99 2274.98,409 2279.98,414 2363,414 v1(2365,416)
"Row 6 \"1\"": EXP3.15 P2.6 | length 1085.3
  Top Layer w5: EXP3.15@2152.99,1231.43 2155.06,1233.5 v1(2278,1233.5) ; P2.6@2273.99,541 2461,541 v1(2466,546)
  Inner Layer w5: v1(2278,1233.5) 2364,1147.5 2364,961.43 2417,908.43 2417,604.64 2466,555.64 v1(2466,546)
"Row 7 \"0\"": EXP3.18 N2.7 | length 1479.3
  Top Layer w5: EXP3.18@2152.99,1308.2 2232.7,1308.2 v1(2235,1310.5)
  Inner Layer w5: v1(2235,1310.5) 2107.5,1310.5 2076,1279 2076,852.78 2077.82,852.78 2099.78,830.82 2099.78,755.82 2108,747.6 2108,469 2223,354 v1(2364,354)
  Bottom Layer w5: N2.7@2272.99,360.99 2277.98,356 2280.98,359 2359,359 v1(2364,354)
"Row 7 \"1\"": EXP3.17 P2.7 | length 1132.6
  Top Layer w5: EXP3.17@2152.99,1282.61 2155.88,1285.5 v1(2278,1285.5) ; P2.7@2273.99,591 2274.99,592 2465,592 v1(2467,590)
  Inner Layer w5: v1(2278,1285.5) 2343.5,1285.5 2379,1250 2379,967.64 2432,914.64 2432,625 v1(2467,590)
RX: U2.26 U3.20 | length 689.8
  Top Layer w5: U3.20@807.53,1819.76 807.53,1875.09 857,1924.57 960,1924.57 1163.49,2128.06 1228,2128.06 1228,2128.51 1260.06,2160.57 U2.26@1260.06,2224
"SCL I2C1": P4.4 U2.37 | length 683
  Top Layer w5: P4.4@959,2062 959,2152 1134,2327 1134.21,2327 1188.69,2381.48 U2.37@1456.91,2381.48
"SCL I2C2": EXP1.22 EXP2.22 EXP3.22 R7.2 U2.33 | length 2821.5
  Top Layer w5: U2.33@1456.91,2302.74 1490.26,2302.74 1513,2280 1513,2162 1586,2089 1586,2038.57 v2(1478,1930.57) ; R7.2@1769,2235.68 1765.32,2235.68 1734,2267 1734,2327.36 1750,2343.36 ; v1(1779,2300) 1750,2329 1750,2343.36 ; EXP2.22@1850.02,2371 1845,2365.98 1772.62,2365.98 1750,2343.36 ; v1(1967,1988) 1967,1967 2056.43,1877.57 EXP1.22@2116.99,1877.57 ; v1(2063,1534) 2022,1575 1989,1575 1969,1555 1969,1515 2073.43,1410.57 EXP3.22@2152.99,1410.57
  Inner Layer w5: v2(1478,1930.57) 1482.57,1930.57 1516.64,1964.64 1658.42,1964.64 1681.79,1988 ; v1(1779,2300) 1763,2284 1763,2068.5 1704.5,2010 1703.79,2010 1681.79,1988 ; v1(2063,1534) 1995,1602 1995,1923 2020.36,1948.36 2020.36,1949 2035,1963.64 2035,1984.36 2020.36,1999 1978,1999 v1(1967,1988) 1681.79,1988
"SDA I2C1": P4.3 U2.42 | length 777.6
  Top Layer w5: P4.3@859,2062 859,2073.21 1127.79,2342 1128,2342 1182.48,2396.48 1294.48,2396.48 1377.91,2479.91 U2.42@1456.91,2479.91
"SDA I2C2": EXP1.23 EXP2.23 EXP3.23 R6.2 U2.31 | length 2733.6
  Top Layer w5: U2.31@1358.48,2224 1358.48,2190.52 1422.5,2126.5 1422.5,1954.5 1398.57,1930.57 v2(1375,1930.57) ; v1(1778.18,2336.18) 1806.61,2336.18 ; EXP2.23@1850.02,2345.41 1845,2340.39 1815.11,2340.39 1810.9,2336.18 1806.61,2336.18 ; R6.2@1874.83,2235.51 1806.61,2303.73 1806.61,2336.18 ; v1(2008,1536) 2107.84,1436.16 EXP3.23@2152.99,1436.16 ; v1(2010,1974) 2080.84,1903.16 EXP1.23@2116.99,1903.16
  Inner Layer w5: v1(1778.18,2336.18) 1748,2306 1748,2075.64 1652,1979.64 1429.07,1979.64 1380,1930.57 v2(1375,1930.57) 1440.57,1865 1580,1865 1678,1963 1978,1963 ; v1(2008,1536) 1978,1566 1978,1963 ; v1(2010,1974) 1989,1974 1978,1963
SYS_SW_CLK: G1.2 U2.46 | length 125.2
  Top Layer w5: U2.46@1458.19,2559.93 U2.46@1456.91,2558.65 1565.65,2558.65 G1.2@1576,2569
SYS_SW_DIO: G1.3 U2.45 | length 148.1
  Top Layer w5: U2.45@1456.91,2538.96 1506.04,2538.96 G1.3@1576,2469
TX: U2.25 U3.21 | length 684.7
  Top Layer w5: U3.21@787.84,1819.76 787,1820.6 787,1878.57 848,1939.57 942,1939.57 1145.49,2143.06 1209,2143.06 1240.37,2174.43 U2.25@1240.37,2224
pads on no net: J1.MH1 J1.MH2 J2. J2.A4-B9 J2.A8 J2.B4-A9 J2.B8 N2.8 N2.11 N4.2 N4.3 N4.4 N4.5 N4.6 N4.7 N4.8 N4.11 N4.12 N4.13 N4.14 N4.15 N4.16 N4.17 P2.8 P2.11 P5.1 P5.2 P5.3 P5.4 P5.5 P5.6 P5.7 P5.12 P5.13 P5.14 P5.15 P5.16 P5.17 P5.18 U2.1 U2.2 U2.3 U2.8 U2.10 U2.11 U2.13 U2.14 U2.15 U2.16 U2.17 U2.18 U2.19 U2.20 U2.21 U2.22 U2.23 U2.24 U2.27 U2.28 U2.29 U2.30 U2.32 U2.34 U2.35 U2.36 U2.38 U2.39 U2.40 U2.41 U2.43 U2.44 U2.47 U2.48 U2.49 U2.50 U2.51 U2.52 U2.53 U2.54 U2.55 U2.56 U2.57 U2.58 U2.59 U2.60 U2.61 U2.62 U2.63 U2.64 U3.1 U3.8 U3.10 U3.11 U3.12 U3.15 U3.17 U3.18 U3.19 U3.22 U3.23 U3.24

## Polygon pours and split planes (outlines as drawn)
GND on GND "GND_L03_P001" (solid, pour order 1): 0,2900 27,2900 2900,2900 2900,0 0,0
RegOut on Bottom Layer "TOP GROUND" (solid, pour order 3): 1676,1191 1676,781 1024,781 1024,1191 1675.46,1191

## Silkscreen, mask and mechanical layers (free items; w line width, h text height)
Top Overlay:
  drawing of 22 lines, arcs and shapes, not listed
  text "C1" at 2574,1411 h40
  text "C10" at 2656,1406 h40
  text "C17" at 2756,633 h40
  text "R1'1'" at 633,539 h40
  text "R7'1'" at 1542.35,537.05 h40
  text "C9" at 2566,451 h40
  text "R7'0'" at 1543.35,439.05 h40
  text "R1'0'" at 631,432 h40
  text "Design: J. Sedlak, K. Chalubek, O. Herman" at 208,148.99 h60
  text "Programming: M. Polek, A. Kmet" at 210,47.99 h60

## Text inside footprints (layer, text, board x,y; h text height)
N1: Bottom Overlay "*" at 2268,2257 h86 r180
N2: Bottom Overlay "*" at 2391,608 h86
N3: Bottom Overlay "*" at 2293,1655 h86 r180
N4: Bottom Overlay "*" at 1344,1961 h86 r90
P1: Top Overlay "*" at 2386,2767 h86
P2: Top Overlay "*" at 2539,285 h86 r180
P3: Top Overlay "*" at 2270,2152 h86
P5: Bottom Overlay "*" at 767,1891 h86 r90